# Altium PCB Micro2.PcbDoc
Units mm, origin at the board's own origin, x right, y up, seen from the top; angles counter-clockwise.
Board outline 13.4 x 13.4 mm, 2 copper layers (Top Layer, Bottom Layer); 3 components, 3 nets, 11 pads, 0 vias.
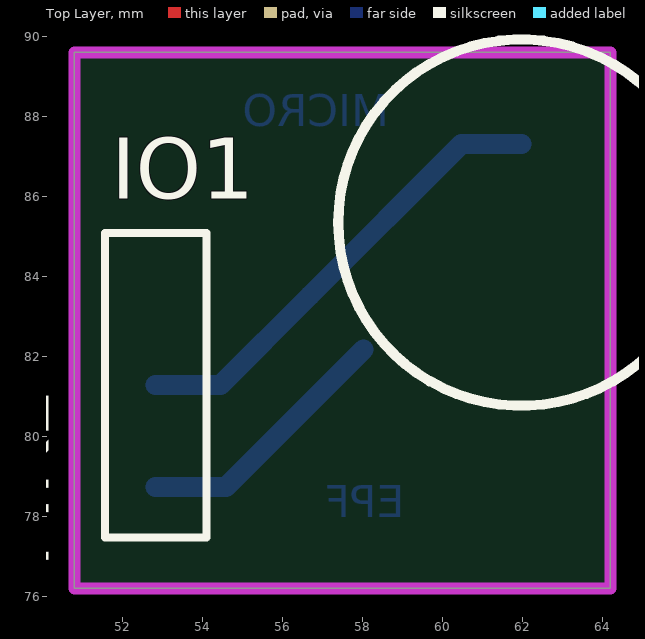
[diagram p0: Top Layer view]
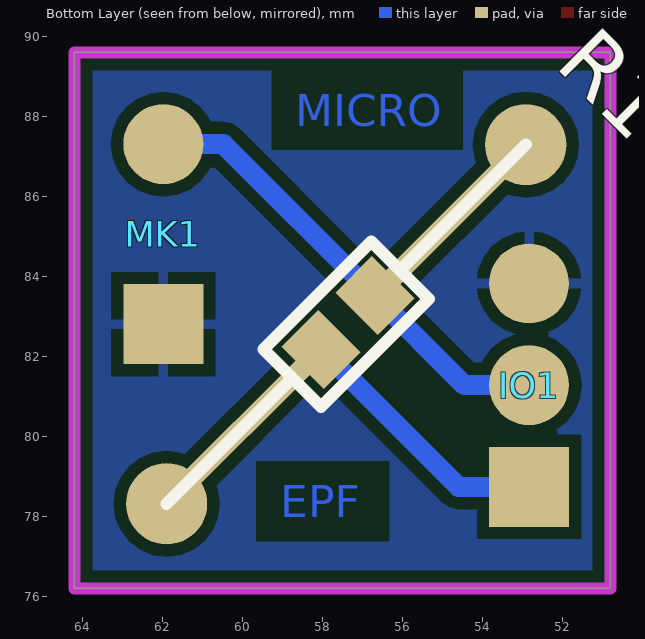
[diagram p1: Bottom Layer view, seen from below]

## Layer stack, top to bottom
Top Layer: signal copper 0.0356
Dielectric: dielectric 0.32, FR-4, Dk 4.8
Bottom Layer: signal copper 0.0356

## Board outline
50.8,76.2 64.2,76.2 64.2,89.6 50.8,89.6

## Design rules (kind name [scope] priority, off if disabled: settings)
Clearance [All] p1: gap=0.3
ComponentClearance [All] p1: gap=0.254 collisioncheckmode=3 verticalgap=0.254
PolygonConnect [All] p1: connectstyle=Relief reliefconductorwidth=0.254 reliefentries=4 polygonreliefangle="90 Angle"
RoomDefinition MicroFM [InComponentClass('MicroFM')] p1: confinementstyle=ConfineIn formatcopy=TRUE lockcomponents=FALSE outline 48.387,73.914 67.183,73.914 67.183,91.821 48.387,91.821
RoutingVias [All] p1: holewidth=0.8 width=2 viastyle="Through Hole" minholewidth=0.711 minwidth=1.27 maxholewidth=0.711 maxwidth=1.27
SolderMaskExpansion [All] p1: expansion=0.102
TestPointUsage [All] p1: valid=0 allowmultiple=FALSE
Testpoint [All] p1: side=15 testpointundercomponent=TRUE minsize=1.016 maxsize=2.54 preferedsize=1.524 minholesize=0 maxholesize=1.016 preferedholesize=0.813 testpointgrid=0.025 style=1023 order=0123456789
Width [All] p1: maxlimit=0.5 minlimit=0.5 preferedwidth=0.5
17 further rules are at their usual default settings.

## Components (designator, comment, footprint, x,y, rotation, side; value= is the part's Value field where it differs from the comment)
IO1 "MicroIO" MicroIO3x1 52.832,78.74 r90 top
MK1 "Mic1" Mic1 61.976,82.804 r90 top
R1 "4k7" proto-resistor 57.404,82.804 r135 bottom

## Footprints (in the part's own frame and the unit in brackets; to place one, negate y for a bottom-side part, rotate by r counter-clockwise, add the part's x,y. Pads: shape width x height; smd on the part's side, far side on the other; paste and mask are expansions set on the pad)
Mic1 [mm]
  rect 2x2 smd far side: 0(0,0)
  round 2 smd far side: 1(4.5,0)
  silkscreen extent -2.04,-4.58 7.12,4.58
MicroIO3x1 [mm]
  rect 2x2 smd far side: 0(0,0)
  round 2 smd far side: 1(2.54,0) 2(5.08,0)
  silkscreen extent -1.27,-1.27 6.35,1.27
proto-resistor [mil] "Resistencia 0805+puente prototipo"
  round 80 smd: 1(-250,0) 2(250,0)
  rect 215x20 smd: 1(-145,0) 2(144.8,0)
  rect 51.18x59.06 smd: 1(-35,0)
  rect 51.18x59.05 smd: 2(39.8,0)
  silkscreen extent -250,-40 250,40

## Part data
MK1: "Microphone"
R1: library part proto-resistor, "Resistencia con conector de prototipado"

## Nets (pads, with @x,y where several pads share a name; then routed paths per layer and width w, separated by ;. In a path a pad name is that pad's centre, name@x,y a point inside that pad or via, vN(x,y) a via of type N, cw(c..) or ccw(c..) an arc to the next point about the centre after c; other vN are vias at no path point)
NetIO1_0: IO1.0 R1.1 | length 6.6
  Bottom Layer w0.5: IO1.0 54.597,78.74 R1.1@58.033,82.175
NetIO1_1: IO1.1 MK1.1 R1.2 | length 11.6
  Bottom Layer w0.5: IO1.1 54.45,81.28 56.689,83.519 60.474,87.304 MK1.1
NetIO1_2: IO1.2 MK1.0

## Polygon pours and split planes (outlines as drawn)
NetIO1_2 on Bottom Layer (solid, remove dead copper): 49.911,90.424 49.911,75.311 65.532,75.311 65.532,90.678

## Keep-outs
Keep-Out Layer:
  the board outline again, w0.3

## Other copper
Bottom Layer:
  text "MICRO" at 58.674,87.757 h0.8
  text "EPF" at 59.055,77.978 h0.8

## Silkscreen, mask and mechanical layers (free items; w line width, h text height)
Drill Drawing:
  text ".LEGEND" at 69.28,81.28 h1.52
  text "Drill Drawing." at 85.471,79.375 h1.52

## Dimensions
50.8,76.2 to 50.8,89.6 on Mechanical 1
50.8,76.2 to 64.2,76.2 on Mechanical 1